# EAGLE board Printsafe cc (EAGLE 9.7.0)

Size 210.36 x 185.17 mm. Coordinates in mm from the lower left corner, seen from the top.
Outline: 0,0 210.36,0 210.36,185.17 0,185.17 0,0
Copper layers (1*16): Top 0.035mm / dielectric 1.5mm / Bottom 0.035mm
Design rules "default": minimum track width 6mil, minimum drill 0.35mm, track to track 6mil, track to pad 6mil, pad to pad 6mil, via to via 6mil, smd to smd 6mil, copper to edge 40mil, drill to drill 6mil, minimum pad ring 10mil, minimum via ring 8mil, stop-mask expansion 4mil, vias tented up to drill 0mil, thermal gap 10mil

## Footprints (pad centres in the part's own frame; a part is rotated, then mirrored left to right if it is on the bottom)
CAPPRD254W65D500H1150B = drill 0.85 pad 1.45: 1 -1.27,0; 2 1.27,0
LEDRD254W60D565H860B = drill 0.981 pad 1.581: 1 -1.27,0; 2 1.27,0
LEDRD254W60D565H860B_G = drill 0.981 pad 1.581: 1 -1.27,0; 2 1.27,0
PIEZO = drill 1 pad 1.6: 1 -3.5,0; 2 3.5,0
RESAD1016W63L850D250B = drill 0.83 pad 1.43: 1 -5.08,0; 2 5.08,0
SWITCH-MOMENTARY-PTH-6.5MM = drill 1.016 pad 1.88: 1 -3.251,2.261; 2 3.251,2.261; 3 -3.251,-2.261; 4 3.251,-2.261
SG90 = drill 1.016 long: 1 -2.54,0; 2 0,0; 3 2.54,0
ARDUINO-UNO-R3-SHIELD = drill 1.016 pad 1.88: 3.3V 24.13,-2.54; 5V 24.13,0; A0 24.13,12.7; A1 24.13,15.24; A2 24.13,17.78; A3 24.13,20.32; A4 24.13,22.86; A5 24.13,25.4; AREF -24.13,-13.97; D2 -24.13,20.32; D3 -24.13,17.78; D4 -24.13,15.24; D5 -24.13,12.7; D6 -24.13,10.16; D7 -24.13,7.62; D8 -24.13,3.81; D9 -24.13,1.27; D10 -24.13,-1.27; D11 -24.13,-3.81; D12 -24.13,-6.35; D13 -24.13,-8.89; GND@0 24.13,2.54; GND@1 24.13,5.08; GND@2 -24.13,-11.43; IOREF 24.13,-7.62; NC 24.13,-10.16; RES 24.13,-5.08; RX -24.13,25.4; SCL -24.13,-19.05; SDA -24.13,-16.51; TX -24.13,22.86; VIN 24.13,7.62
LCD-I2C = drill 1.016 long: 1 -19.05,-5.08; 2 -19.05,-7.62; 3 -19.05,-10.16; 4 -19.05,-12.7

## Placement (x,y rotation side)
C1  1000u  [CAPPRD254W65D500H1150B]  190.84,97.46 180 top
D1  RED  [LEDRD254W60D565H860B]  74.43,131.25 180 top
D2  GREEN  [LEDRD254W60D565H860B_G]  82.71,128.1 180 top
PIEZO5  PIEZO  [PIEZO]  41.74,140.9 0 top
PIEZO6  PIEZO  [PIEZO]  11.73,140.63 0 top
R1  220  [RESAD1016W63L850D250B]  73.08,123.77 90 top
R5  220  [RESAD1016W63L850D250B]  81.44,123.02 90 top
R7  10k  [RESAD1016W63L850D250B]  191.87,168.92 90 top
R8  10k  [RESAD1016W63L850D250B]  180.29,168.08 90 top
S4  SWITCH_MOMENTARY  [SWITCH-MOMENTARY-PTH-6.5MM]  194.41,177.81 90 top
S5  SWITCH_MOMENTARY  [SWITCH-MOMENTARY-PTH-6.5MM]  182.83,176.97 90 top
SERVO1  SERVOSG90  [SG90]  65.14,44.82 0 top
SERVO2  SERVOSG90  [SG90]  41.1,44.01 0 top
U1  ARDUINO-UNO-R3-SHIELD  [ARDUINO-UNO-R3-SHIELD]  81.16,81.8 270 top
U4  LCD-16X2-I2CSUNFOUNDER-IIC  [LCD-I2C]  154.73,36.63 0 top

## Library data of the parts
C1 PIEZO5 PIEZO6 R1 R5 R7 R8 S4 S5 SERVO1 SERVO2 U1 U4 = Tinkercad
D1 = Tinkercad; CATEGORY: Opto-Electronic; SUB-CATEGORY: LED; VALUE: LED_RED
D2 = Tinkercad; CATEGORY: Opto-Electronic; SUB-CATEGORY: LED; VALUE: LED_GREEN

## Nets
D1_C: D1.2 R1.2
D2_C: D2.2 R5.2
U1_5V: C1.1 C1.2 S4.3 S5.3 SERVO1.1 SERVO1.2 SERVO2.1 SERVO2.2 U1.5V U4.2
U1_A4: U1.A4 U4.3
U1_A5: U1.A5 U4.4
U1_D2: R7.2 S4.1 S4.2 U1.D2
U1_D3: R8.2 S5.1 S5.2 U1.D3
U1_D6: R5.1 U1.D6
U1_D7: R1.1 U1.D7
U1_D8: PIEZO5.1 U1.D8
U1_D9: SERVO1.3 U1.D9
U1_D10: PIEZO6.1 U1.D10
U1_D11: SERVO2.3 U1.D11
U1_GND: D1.1 D2.1 PIEZO5.2 PIEZO6.2 R7.1 R8.1 U1.GND@0 U1.GND@1 U1.GND@2 U4.1

## Tracks (layer width: path | path; a pad name or v marks a point on that pad's centre or on a via)
D1_C  (1 unrouted)
D2_C  (1 unrouted)
U1_5V  (9 unrouted)
U1_A4  (1 unrouted)
U1_A5  (1 unrouted)
U1_D2  (3 unrouted)
U1_D3  (3 unrouted)
U1_D6  (1 unrouted)
U1_D7  (1 unrouted)
U1_D8  (1 unrouted)
U1_D9  (1 unrouted)
U1_D10  (1 unrouted)
U1_D11  (1 unrouted)
U1_GND  (9 unrouted)